# Altium PCB ALTAIR_PD_Soldier_V26.4c.PcbDoc (part 3 of 4)
Units mm, origin at the board's own origin, x right, y up, seen from the top; angles counter-clockwise.
Board outline 74 x 56 mm, 4 copper layers (Top Layer, Layer 1, Layer 2, Bottom Layer), stack 1.675 mm thick; 191 components, 116 nets, 579 pads, 435 vias.
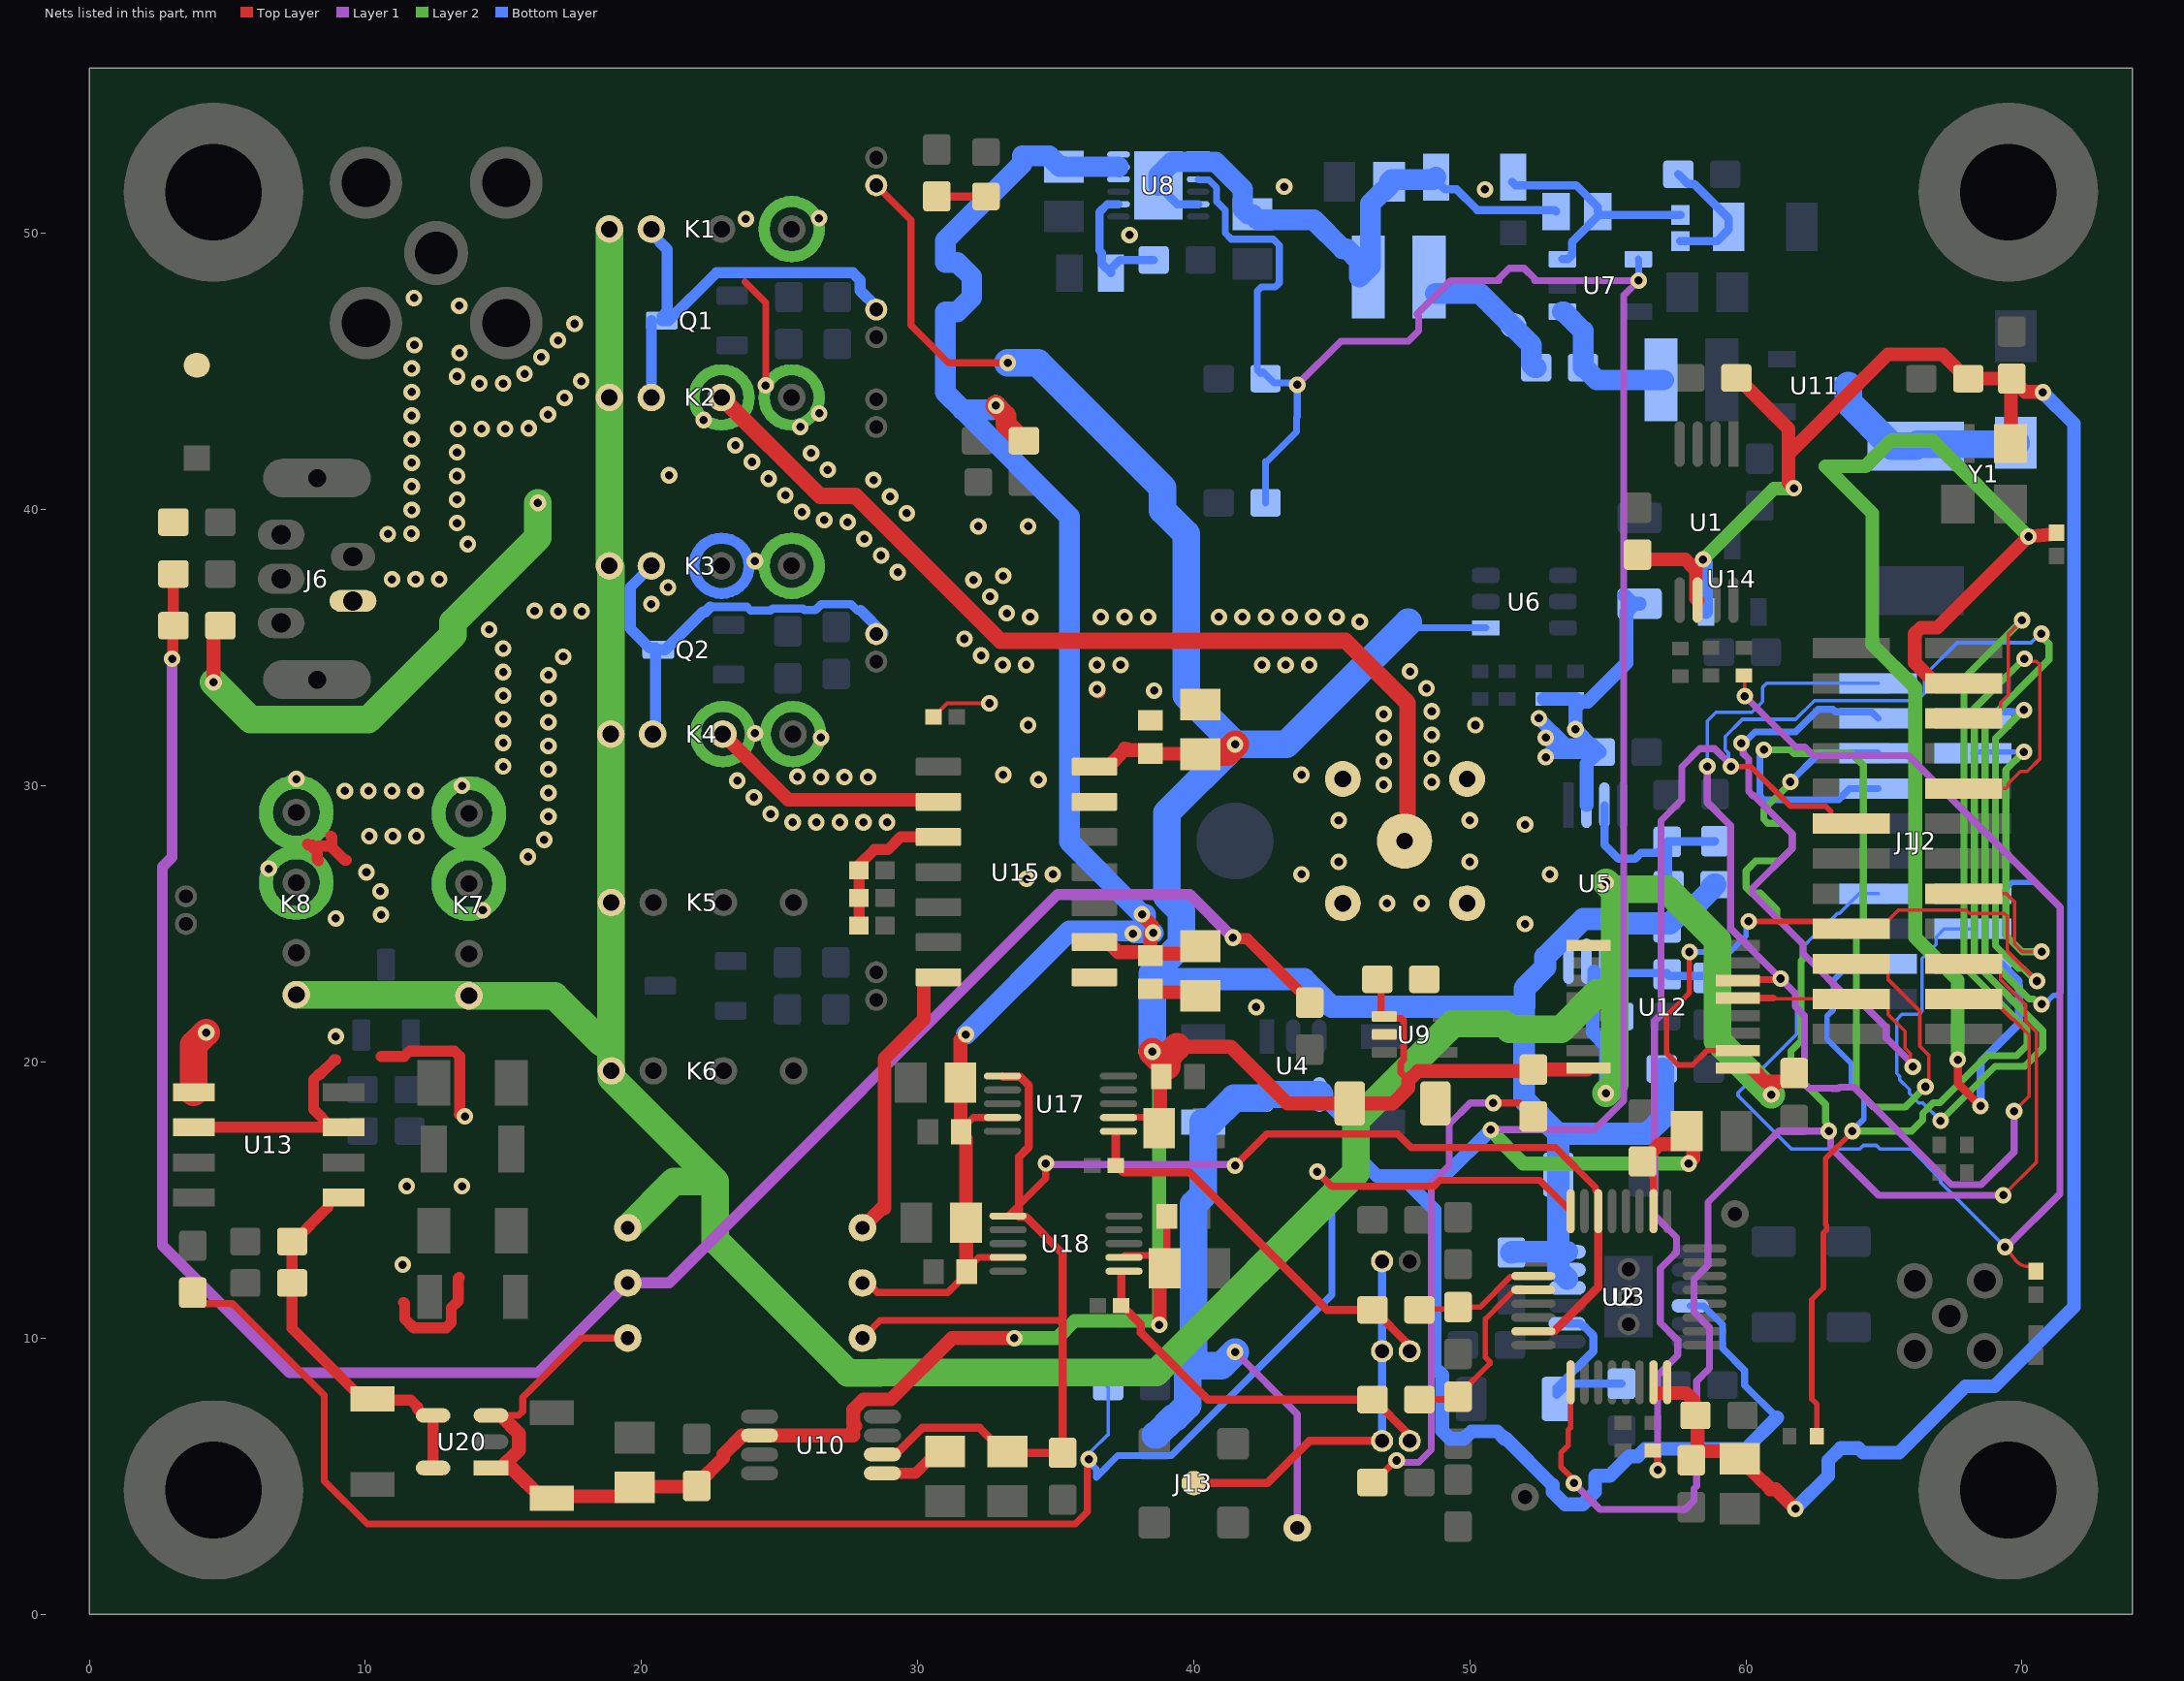
[diagram p4: the nets of this part, all layers, seen from the top]

## Via types
v1: diameter 0.6, hole 0.3, Top Layer to Bottom Layer, tented both sides, 157 vias
v2: diameter 0.6, hole 0.3, Top Layer to Bottom Layer, 156 vias
v3: diameter 0.8, hole 0.5, Top Layer to Bottom Layer, 122 vias

## Nets (pads, with @x,y where several pads share a name; then routed paths per layer and width w, separated by ;. In a path a pad name is that pad's centre, name@x,y a point inside that pad or via, vN(x,y) a via of type N, cw(c..) or ccw(c..) an arc to the next point about the centre after c; other vN are vias at no path point) (continued)
GUARD: (continued)
  other v2: 11.349,12.662 11.5,15.5 13.5,15.5 13.604,18.031 8.93,20.929 8.93,25.199 10.57,25.33 14.25,25.5 47,25.75 48.25,25.75 10.544,26.184 10.038,26.871 6.5,27 45.25,27.25 50,27.25 15.884,27.435 16.476,28.05 10.14,28.18 10.994,28.18 11.848,28.18 25.476,28.68 26.33,28.68 27.184,28.68 28.038,28.68 28.892,28.68 45.25,28.75 50,28.75 16.63,28.891 24.677,28.983 24.073,29.587 16.63,29.745 9.257,29.82 10.111,29.82 10.965,29.82 11.819,29.82 13.5,30 46.879,30.041 48.621,30.139 23.469,30.191 7.5,30.25 25.644,30.335 26.498,30.32 27.352,30.32 28.206,30.32 16.63,30.599 14.99,30.707 46.879,30.895 48.621,30.993 16.63,31.453 14.99,31.561 26.5,31.75 46.879,31.749 48.621,31.847 24.112,31.903 16.63,32.307 14.99,32.415 46.879,32.603 48.621,32.701 16.63,33.161 14.99,33.269 48.432,33.534 16.63,34.015 14.99,34.123 47.836,34.145 33.081,34.379 33.935,34.379 36.497,34.379 37.351,34.379 42.475,34.379 43.329,34.379 44.183,34.379 17.165,34.68 32.298,34.72 14.99,34.977 31.694,35.324 14.485,35.666 46.014,35.946 34.076,36.121 36.638,36.121 37.492,36.121 38.346,36.121 40.908,36.121 41.762,36.121 42.616,36.121 43.47,36.121 44.324,36.121 45.178,36.121 33.232,36.249 16.982,36.32 17.836,36.32 16.128,36.341 20.355,36.587 32.628,36.853 20.959,37.191 12.674,37.477 32.024,37.457 10.966,37.48 11.82,37.48 29.279,37.74 24.107,38.141 28.675,38.344 13.713,38.757 28.071,38.947 10.814,39.12 11.668,39.137 13.32,39.515 27.467,39.551 26.617,39.629 29.609,39.872 25.814,39.92 11.68,39.991 13.32,40.369 29.005,40.476 25.21,40.524 11.68,40.845 28.401,41.08 24.606,41.127 13.32,41.223 26.748,41.448 11.68,41.699 24.002,41.731 26.144,42.052 13.32,42.077 23.398,42.335 11.68,42.553 13.355,42.93 14.209,42.93 15.063,42.93 15.916,42.952 25.75,43 22.25,43.25 11.68,43.407 16.61,43.451 26.434,43.491 17.214,44.054 11.68,44.261 14.133,44.57 14.987,44.57 17.818,44.658 13.32,44.83 15.764,44.924 11.68,45.115 16.368,45.528 13.415,45.678 11.775,45.964 16.972,46.131 17.576,46.735 13.4,47.386 11.76,47.672 23.779,50.529 26.431,50.556
IVC_ADCIN: C63.2 R75.2 U2.4 | length 6.8
  Top Layer w0.2: C63.2@49.646,8.004 50.725,9.083 50.725,9.141 50.565,9.301 50.565,10.699 51.201,11.335 ; 51.202,11.335 51.598,11.731 U2.4@52.272,11.731
  Top Layer w0.254: R75.2@48.171,7.779 49.471,7.779 C63.2@49.571,7.879
IVC_CAPLINK: R58.1 R59.1 R60.1 U15.3 | length 5.5
  Top Layer w0.4: R60.1@27.875,24.941 27.875,27.137 28.431,27.693 28.923,27.693 29.381,28.151 U15.3@30.75,28.151
IVC_LVLAMP_OUT: JIVC.1 R63.2 R75.1 U18.6 | length 14
  Top Layer w0.3: U18.6@37.375,12.4 R63.2@37.375,11.185 37.4,11.185 38.08,10.505 38.08,10.202 40.503,7.779 R75.1@46.471,7.779 46.521,7.779 47.725,6.575 47.725,6.375 JIVC.1@47.821,6.279
IVC_RELAY_GND: J11.2 K3.2 K4.2 Q2.3 | length 16.4
  Bottom Layer w0.3: 22.494,36.483 23.82,36.483 23.945,36.358 24.619,36.358 24.689,36.358 24.758,36.427 25.842,36.427 25.902,36.367 26.298,36.367 26.508,36.577 27.592,36.577 27.811,36.358 27.931,36.358
  Bottom Layer w0.4: K3.2@20.358,37.971 20.358,37.954 19.589,37.184 19.589,35.699 20.288,35 Q2.3@20.5,35 ; K4.2@20.405,31.874 20.506,31.975 20.506,34.931 Q2.3@20.506,34.994 ; Q2.3@20.607,34.931 20.857,34.931 22.226,36.3 22.311,36.3 22.494,36.483 ; 27.931,36.358 28.75,35.539 J11.2@28.75,35.5
IVC_SW_1_Sol: J1.21 J2.03 U12.5 | length 29.4
  Top Layer w0.127: 60.997,22.317 61.03,22.285 64.849,22.285 65.153,21.98 65.153,21.716 65.757,21.113 65.757,20.502 65.953,20.305 65.953,19.918 v1(66.044,19.827)
  Top Layer w0.254: U12.5@59.7,22.317 60.997,22.317
  Layer 1 w0.254: v1(59.831,31.55) 59.897,31.483 59.897,31.172 60.099,30.97 60.099,29.796 60.248,29.647 60.295,29.647 61.674,28.268 61.674,27.732 60.242,26.3 60.242,26.09 62.064,24.268 62.064,23.937 63.848,22.152 64.178,22.152 65.076,21.254 65.076,20.878 66.044,19.91 v1(66.044,19.827)
  Bottom Layer w0.254: v1(59.831,31.55) 59.925,31.55 60.331,31.956 61.791,31.956 62.607,32.772 63.143,32.772 63.229,32.686 64.545,32.686 J2.03@64.786,32.445
IVC_SW_2_Sol: J1.22 J2.01 U12.6 | length 40.3
  Top Layer w0.127: J1.22@67.884,22.285 68.913,22.285 69.649,21.548 69.685,21.548 70.26,20.974 70.26,20.869 70.26,18.768 v1(69.71,18.218)
  Top Layer w0.254: U12.6@59.7,22.952 59.734,22.986 61.219,22.986 v1(61.253,23.02)
  Layer 1 w0.254: v1(58.598,30.702) 58.598,29.4 59.44,28.559 59.44,24.832 61.172,23.1 61.333,23.1 61.366,23.068 61.366,22.907 61.789,22.484 61.789,22.01 62.119,21.679 62.119,19.199 62.268,19.05 63.129,19.05 63.131,19.048 63.342,19.048 63.379,19.085 63.915,19.085 67.441,15.559 68.522,15.559 69.71,16.747 v1(69.71,18.218)
  Bottom Layer w0.127: v1(58.598,30.702) 58.598,32.351 58.914,32.667 60.214,32.667 60.604,33.056 60.604,33.566 60.753,33.715 J2.01@64.786,33.715
IVC_SW_IN: K4.3 U15.2 | length 8.8
  Top Layer w0.5: K4.3@22.945,31.874 25.319,29.5 U15.2@30.75,29.5
MMCX_Testcon: J13.1 JACF.2 JIVC.2 JTIA.2 | length 14
  Top Layer w0.3: J13.1@40,4.75 42.658,4.75 44.187,6.279 JIVC.2@46.821,6.279
  Bottom Layer w0.3: JIVC.2@46.821,6.279 JACF.2@46.821,9.529 JTIA.2@46.821,12.779
NetC00_2: C00.2 R0.1 R33.1 TP7.1 | length 76.7
  Top Layer w0.4: v1(3,34.6) 3.024,34.624 C00.2@3.024,35.777 ; C00.2@3.047,35.801 R0.1@3.047,37.676 ; v1(41.417,24.503) 41.456,24.465 41.935,24.465 44.2,22.2 R33.1@44.2,22.15
  Layer 1 w0.4: v1(3,34.6) 3,27.419 2.646,27.065 2.646,13.354 7.25,8.75 16.25,8.75 TP7.1@19.5,12 21,12 35.07,26.07 39.85,26.07 v1(41.417,24.503)
NetC3_2: C3.2 R15.2 U3.8 | length 6.3
  Bottom Layer w0.3: U3.8@53.525,10.525 54.004,10.525 54.127,10.402 54.168,10.402 54.477,10.093 54.477,9.527 53.15,8.2 53.15,7.95 53.55,8.35 R15.2@55.5,8.35
NetC7_1: C7.1 U10.5 | length 2
  Top Layer w0.4: U10.5@28.725,5.108 29.925,5.108 C7.1@30.5,5.683
NetC10_2: C10.2 R21.1 R22.2 U5.5 | length 5.6
  Bottom Layer w0.3: C10.2@55.375,21.65 55.51,21.785 55.51,23.634 U5.5@55.525,23.65 55.525,23.262 55.562,23.225 R21.1@57.15,23.225 ; R21.1@57.15,23.175 57.212,23.113 58.538,23.113 R22.2@58.6,23.05
NetC11_2: C11.2 R23.1 R24.2 U5.3 | length 7.5
  Bottom Layer w0.3: U5.3@54.875,29.3 54.875,27.872 55.383,27.365 55.986,27.365 56.2,27.579 56.8,27.579 57.15,27.929 C11.2@57.15,27.975 ; R23.1@57.2,26.425 57.175,26.45 57.175,27.95 C11.2@57.15,27.975 ; R24.2@58.875,28 58.862,27.988 57.162,27.988 C11.2@57.15,27.975
NetC15_1: C15.1 L1.2 U7.1 | length 5.4
  Bottom Layer w0.75: U7.1@53.35,47.175 53.4,47.175 54.1,46.475 C15.1@54.1,45.15 ; C15.1@54.15,45.15 54.6,44.7 L1.2@57.024,44.7
NetC15_2: C15.2 D1.2 L2.1 | length 5.2
  Bottom Layer w0.75: L2.1@48.75,47.836 50.364,47.836 51.454,46.746 51.454,46.741 52.225,45.97 52.225,45.275 52.35,45.15 C15.2@52.4,45.15
NetC16_2: C16.2 R29.1 R30.2 U7.3 | length 8.7
  Bottom Layer w0.3: C16.2@51.525,51.875 51.648,51.752 53.848,51.752 54.625,50.975 R29.1@54.625,50.8 ; U7.3@53.35,49.075 53.55,49.075 53.7,49.225 53.7,49.7 R29.1@54.625,50.625 ; R29.1@54.746,50.679 R30.2@57.625,50.679
NetC17_1: C17.1 R30.1 R31.2 | length 4.8
  Bottom Layer w0.3: C17.1@57.55,52.15 57.9,51.8 58.125,51.8 59.375,50.55 R31.2@59.375,50.25 59.375,50.146 58.95,49.721 R30.1@57.625,49.721
NetC21_1: C21.1 R32.1 U8.8 | length 5
  Bottom Layer w0.3: U8.8@37.278,51.067 36.875,51.067 36.586,50.778 36.586,49.389 36.675,49.3 36.675,48.9 C21.1@37,48.575 37,48.725 37.325,49.05 R32.1@38.55,49.05
NetC32_2: C32.2 RT1.2 U2.32 | length 69.5
  Top Layer w0.254: RT1.2@3.75,11.65 3.75,11.619 4.123,11.246 5.195,11.246 8.512,7.929 8.512,4.829 10.07,3.271 35.707,3.271 36.148,3.712 36.148,5.562 v1(36.202,5.616) ; v1(44.472,16.028) 45,15.5 48.702,15.5 48.922,15.72 52.53,15.72 U2.32@53.65,14.6
  Bottom Layer w0.127: v1(36.202,5.616) 36.293,5.707 36.293,5.91 36.883,6.5 36.9,6.5 C32.2@36.9,8.25 C32.2@36.85,8.25
  Bottom Layer w0.254: v1@36.191,5.639 36.191,5.534 36.47,5.254 36.47,4.969 37.247,5.746 39.182,5.746 45,11.564 45,15.5 v1(44.472,16.028)
NetD2_2: D2.2 R18.1 | length 1.8
  Top Layer w0.3: R18.1@30.696,51.35 D2.2@32.475,51.35
NetD4_1: D4.1 F1.2 U11.3 | length 7.4
  Bottom Layer w1: U11.3@63.7,44.5 63.7,43.895 65.29,42.305 F1.2@66.15,42.305 66.211,42.366 69.712,42.366 D4.1@69.773,42.427